# Altium PCB PCB1.PcbDoc
Units mil, origin at the board's own origin, x right, y up, seen from the top; angles counter-clockwise.
Board outline 725 x 795 mil, 2 copper layers (Top Layer, Bottom Layer); 7 components, 6 nets, 16 pads, 0 vias.
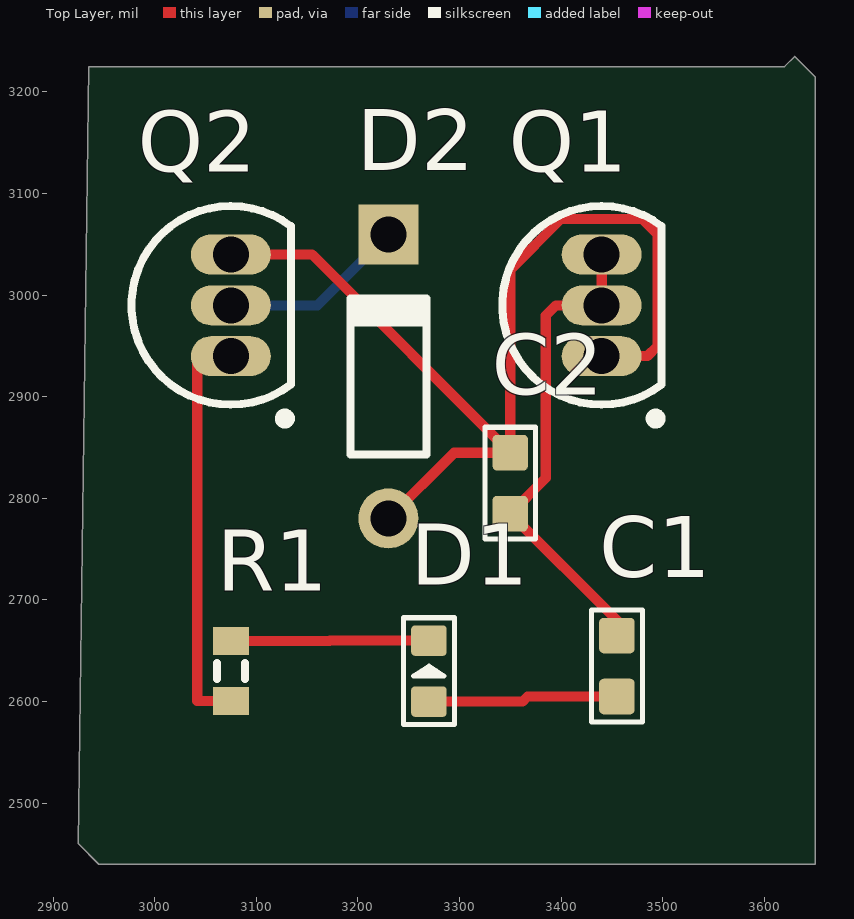
[diagram p0: Top Layer view]
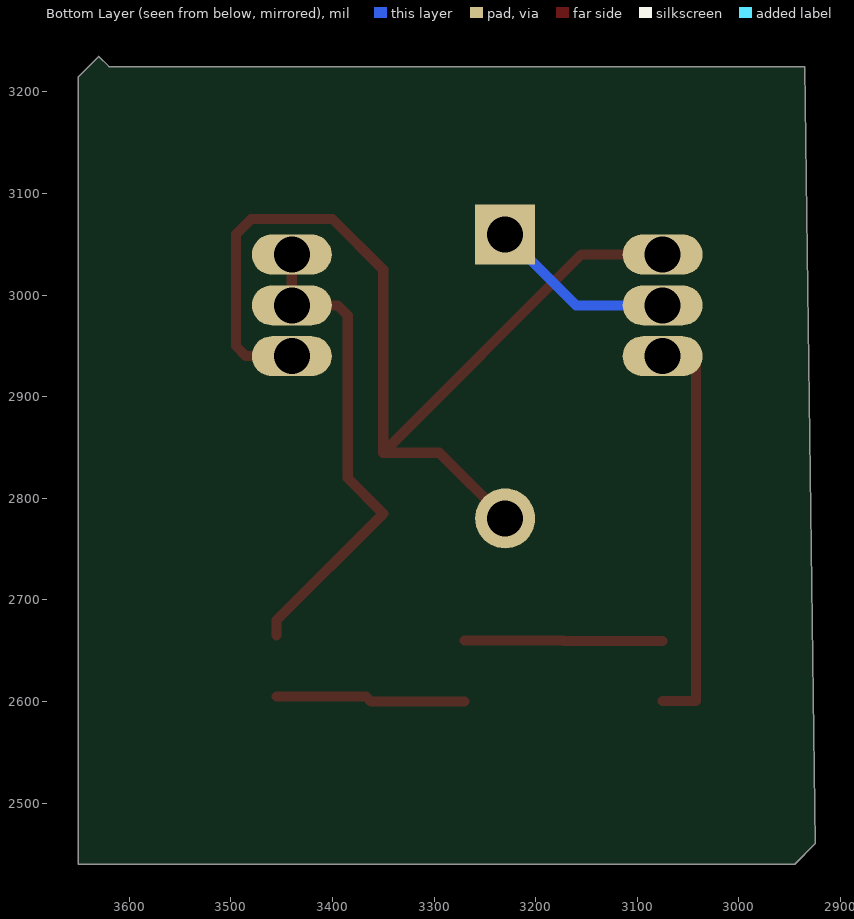
[diagram p1: Bottom Layer view, seen from below]

## Layer stack, top to bottom
Top Solder: solder mask 0.4, Solder Resist, Dk 3.5
Top Layer: signal copper 1.4
Dielectric 1: dielectric 12.6, FR-4, Dk 4.8
Bottom Layer: signal copper 1.4
Bottom Solder: solder mask 0.4, Solder Resist, Dk 3.5

## Board outline
2935,3225 3620,3225 3630,3235 3650,3215 3650,2440 2945,2440 2925,2460

## Design rules (kind name [scope] priority, off if disabled: settings)
Clearance [All] p1: gap=10
PolygonConnect [All] p1: connectstyle=Relief reliefconductorwidth=10 reliefentries=4 polygonreliefangle="90 Angle" airgapwidth=10
RoomDefinition Sheet1 [InComponentClass('Sheet1')] p1: confinementstyle=ConfineIn formatcopy=TRUE lockcomponents=FALSE outline 2965,2470 3625,2470 3625,3200 2965,3200
RoutingVias [All] p1: holewidth=28 width=50 viastyle="Through Hole" minholewidth=28 minwidth=50 maxholewidth=28 maxwidth=50
SolderMaskExpansion [All] p1: expansion=4
Width [All] p1: maxlimit=10 minlimit=10 preferedwidth=10
30 further rules are at their usual default settings.

## Components (designator, comment, footprint, x,y, rotation, side; value= is the part's Value field where it differs from the comment)
C1 "302010130" C0603 3455,2635 r0 top
C2 "302010130" C0603 3350,2815 r0 top
D1 "Red" LED-0603 3270,2630 r90 top
D2 "Diode 1N4448" DO-35 3230,2920 r90 top
Q1 "2N3904" TO-92A 3440,2990 r0 top
Q2 "2N3904" TO-92A 3075,2990 r0 top
R1 "Res3" J1-0603 3075,2630 r90 top

## Footprints (in the part's own frame and the unit in brackets; to place one, negate y for a bottom-side part, rotate by r counter-clockwise, add the part's x,y. Pads: shape width x height; smd on the part's side, far side on the other; paste and mask are expansions set on the pad)
C0603 [mil]
  rrect25% 35x35 smd: 1(0,30) 2(0,-30)
  silkscreen extent -25,-55 25,55
DO-35 [mm] "Diode, Axial; Body 3.8 x 1.9 mm (LxDia. max), Lead Dia. 0.53 mm (max)"
  round 1.5 hole 0.9: 1(-3.55,0)
  rect 1.5x1.5 hole 0.9: 2(3.55,0)
  silkscreen extent -1.95,-0.95 2.05,0.95
J1-0603 [mm] "Chip Resistor, Body 1.6x0.8mm, IPC High Density"
  rect 0.7x0.9 smd: 1(-0.75,0) 2(0.75,0)
  silkscreen extent -0.2,-0.35 0.2,0.35, body extent -0.85,-0.48 0.85,0.48, height 0.9
LED-0603 [mil]
  rrect25% 30x35 smd: +(-30,0) -(30,0)
  silkscreen extent -52,-25 52,25
TO-92A [mm] "TO, Flat Index; 3 In-Line, Axial Leads; Body Dia. 4.5mm; Leads 0.51 x 0.48 mm (max)"
  oval 2x1 hole 0.9: 1(0,-1.27) 2(0,0) 3(0,1.27)
  silkscreen extent -2.48,-2.95 1.5,2.48, body extent -2.48,-2.5 1.5,2.5, height 6.86

## Part data
C1 C2: library part CERAMIC-470PF-100V-5%-NP0(0603)
D1: library part LED-0603
D2: "High Conductance Fast Diode"
Q1 Q2: "NPN General Purpose Amplifier"
R1: "Resistor"

## Nets (pads, with @x,y where several pads share a name; then routed paths per layer and width w, separated by ;. In a path a pad name is that pad's centre, name@x,y a point inside that pad or via, vN(x,y) a via of type N, cw(c..) or ccw(c..) an arc to the next point about the centre after c; other vN are vias at no path point)
3.3V: C1.2 D1.+ | length 187.1
  Top Layer w10: D1.+ 3362,2600 3367,2605 C1.2
GND: Q2.1 R1.1 | length 405.5
  Top Layer w10: R1.1 3042,2600.47 3042,2940 Q2.1
NetC2_1: C2.1 D2.1 Q1.1 Q2.3 | length 1023.7
  Top Layer w10: Q2.3 3155,3040 C2.1 ; D2.1 3294.76,2845 C2.1 ; Q1.1 3485,2940 3495,2950 3495,3060 3480,3075 3400,3075 3350,3025 C2.1
NetD1_-: D1.- R1.2 | length 195.2
  Top Layer w10: R1.2 3172,2659.53 3172.47,2660 D1.-
OUT1: D2.2 Q2.2 | length 183.9
  Bottom Layer w10: Q2.2 3160.24,2990 D2.2
VCC: C1.1 C2.2 Q1.2 Q1.3 | length 482.1
  Top Layer w10: Q1.3 Q1.2 3395,2990 3385,2980 3385,2820 C2.2 3455,2680 C1.1